# Altium PCB HeadTiltController_V1.PcbDoc
Units mil, origin at the board's own origin, x right, y up, seen from the top; angles counter-clockwise.
Board outline 741.62 x 2350 mil, 2 copper layers (Top Layer, Bottom Layer); 13 components, 34 nets, 76 pads, 9 vias.
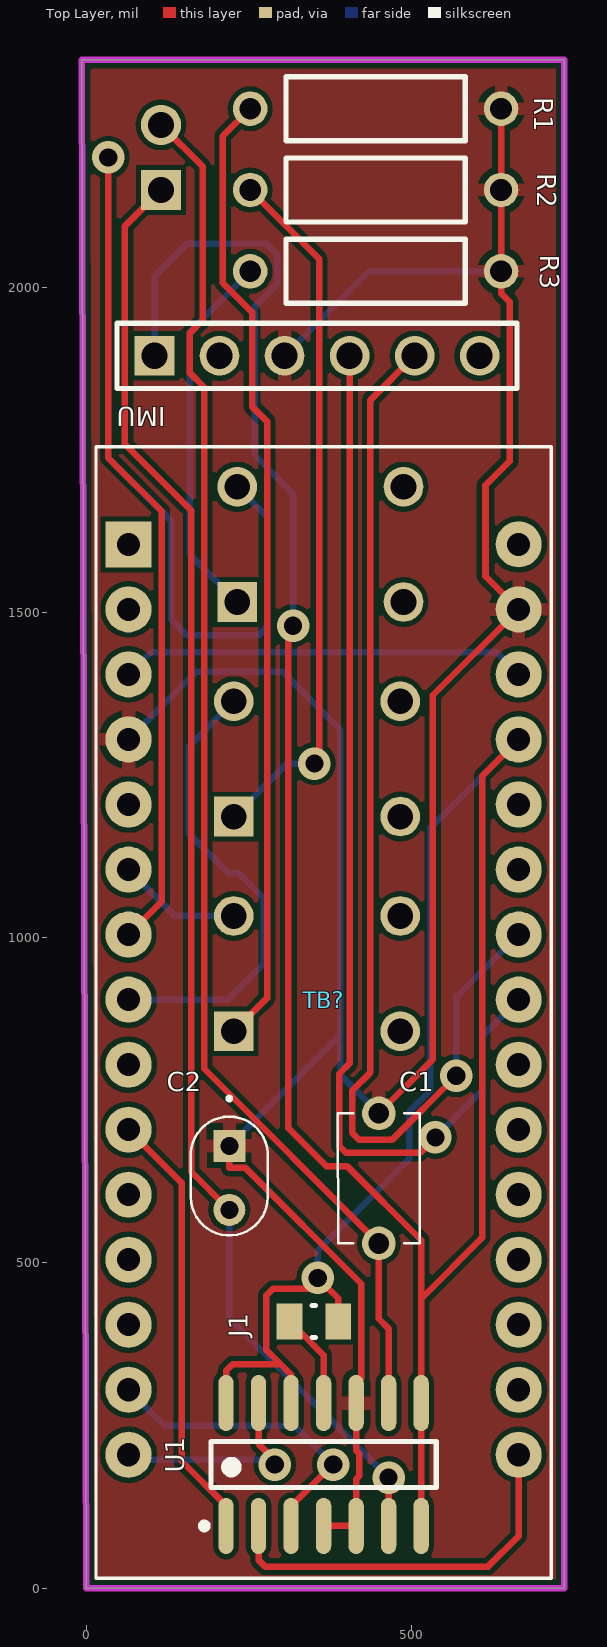
[diagram p0: Top Layer view]
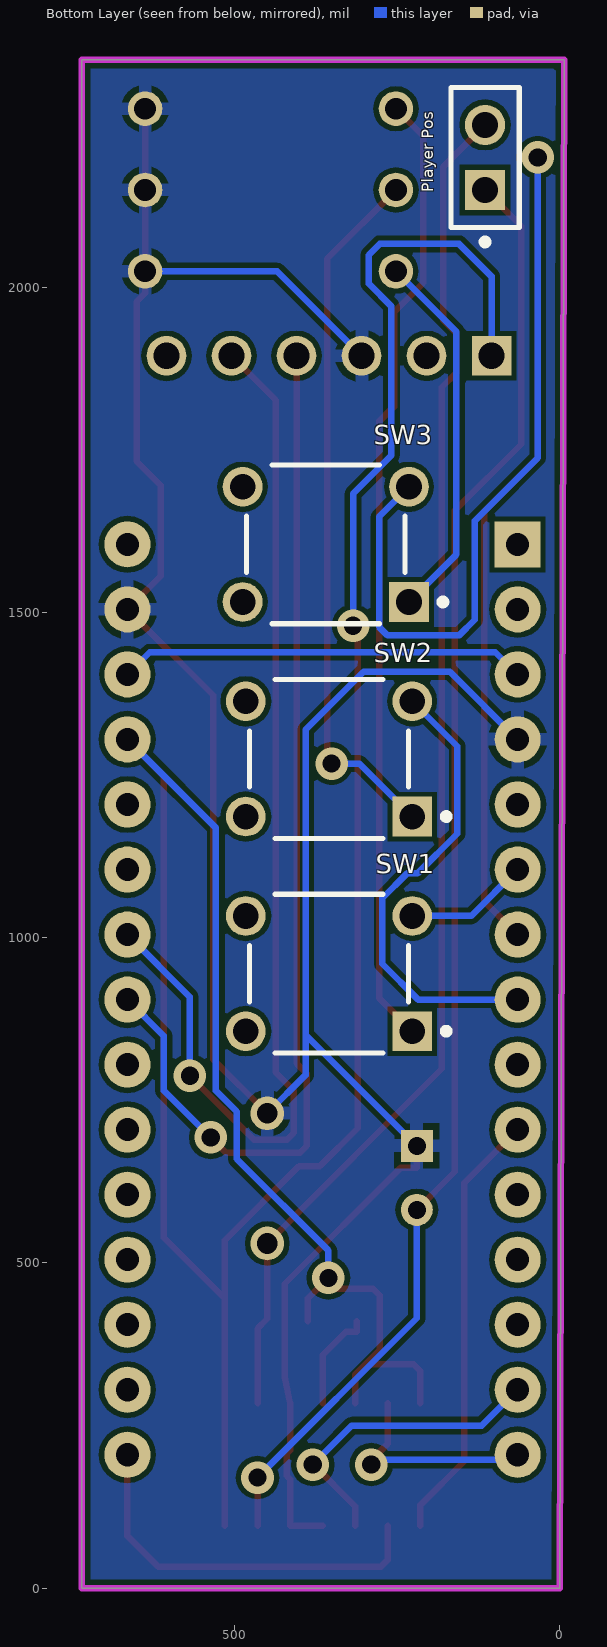
[diagram p1: Bottom Layer view, seen from below]
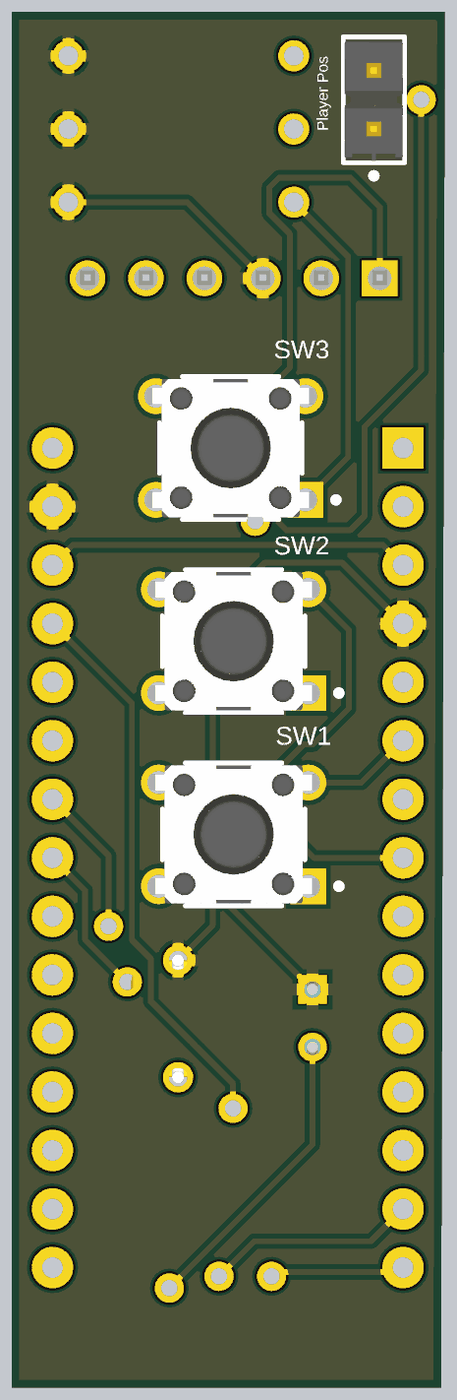
[diagram p2: 3D render of the assembled board from below, using the file's embedded part models]

## Layer stack, top to bottom
Top Solder: solder mask 0.4, Solder Resist, Dk 3.5
Top Layer: signal copper 1.4
Dielectric 1: dielectric 12.6, FR-4, Dk 4.8
Bottom Layer: signal copper 1.4
Bottom Solder: solder mask 0.4, Solder Resist, Dk 3.5

## Board outline
-6.62,2350 735,2350 735,0 0,0

## Design rules (kind name [scope] priority, off if disabled: settings)
BoardOutlineClearance [All] p1: gap=7.87 ignorepadtopadclearanceinfootprint=FALSE except(15.75: Arc-SplitBarrior Arc-SplitContinuation Track-SplitBarrior Track-SplitContinuation SMDPad-SplitBarrior SMDPad-SplitContinuation THPad-SplitBarrior THPad-SplitContinuation Via-SplitBarrior Via-SplitContinuation Fill-SplitBarrior Fill-SplitContinuation Poly-SplitBarrior Poly-SplitContinuation Region-SplitBarrior Region-SplitContinuation Text-SplitBarrior Text-SplitContinuation)
Clearance "Clearance Bottom Layer" [OnLayer('Bottom Layer')] p1: gap=8 ignorepadtopadclearanceinfootprint=TRUE except(10: Arc-Text Track-Text SMDPad-Text THPad-Text Via-Text Fill-Text Poly-Text Region-Text Text-Text)
Clearance "Clearance Top Layer" [OnLayer('Top Layer')] p2: gap=8 ignorepadtopadclearanceinfootprint=TRUE except(10: Arc-Text Track-Text SMDPad-Text THPad-Text Via-Text Fill-Text Poly-Text Region-Text Text-Text)
Clearance [All] p3: gap=7.87 ignorepadtopadclearanceinfootprint=FALSE except(3.5: Arc-Arc Arc-Track Arc-SMDPad Track-Track Track-SMDPad SMDPad-SMDPad; 5: Arc-Via Track-Via SMDPad-Via THPad-Via Via-Via; 10: Arc-Text Track-Text SMDPad-Text THPad-Text Via-Text Fill-Text Poly-Text Region-Text Text-Text)
HoleSize [All] p1: absolutevalues=TRUE maxlimit=248.03 minlimit=7.87 maxpercent=80.000 minpercent=20.000
MinimumAnnularRing [All] p1: minimumring=3
MinimumSolderMaskSliver [All] p1: minsoldermaskwidth=3.94
PolygonConnect PolygonConnect_1 [All] p1: thpad.connectstyle=Relief thpad.reliefconductorwidth=20 thpad.reliefentries=4 thpad.polygonreliefangle="90 Angle" thpad.airgapwidth=10 smdpad.connectstyle=Relief smdpad.reliefconductorwidth=20 smdpad.reliefentries=4 smdpad.polygonreliefangle="90 Angle" smdpad.airgapwidth=10 via.connectstyle=Direct via.reliefconductorwidth=20 via.reliefentries=4 via.polygonreliefangle="90 Angle" via.airgapwidth=10
RoutingCorners [All] p1: cornerstyle=Round minsetback=100 maxsetback=100
RoutingVias [All] p1: holewidth=19.68 width=39.37 viastyle="Through Hole" minholewidth=7.87 minwidth=17.72 maxholewidth=39.37 maxwidth=78.74
SilkToSilkClearance [All] p1: silktosilkclearance=3.94
SilkToSolderMaskClearance [IsPad] p1: minsilkscreentomaskgap=3.94 clearancetoexposedcopper=TRUE
SolderMaskExpansion [All] p1: expansion=4 istentingtop=FALSE
Width [All] p1: maxlimit=100 minlimit=3.5 preferedwidth=15
25 further rules are at their usual default settings.

## Classes and differential pairs
component class HeadTiltController_V1: C1 C2 IMU J1 "Player Pos" R1 R2 SW1 SW2 SW3 U1

## Components (designator, comment, footprint, x,y, rotation, side; value= is the part's Value field where it differs from the comment)
C1 "4.7uF" C322C475K5R5TA 450,730 r270 top
C2 "10uF" FG14 220,680 r270 top
IMU "TSW-106-07-G-S" SMTC-TSW-106-07-X-S 105,1895 r0 top
J1 "" FP-CRCW0805-e3-IPC_B 350,410 r180 top
"Player Pos" "TSW-102-07-G-S" FP-TSW-102-07-G-S-MFG 115,2200 r90 bottom
R1 "10k" OMTE-RES7X2.5-2 445,2275 r0 top
R2 "10k" OMTE-RES7X2.5-2 445,2150 r0 top
R3 "10k" OMTE-RES7X2.5-2 445,2025 r0 top
SW1 "B3F-1070" FP-B3F-1070-MFG#1 355,945 r180 bottom
SW2 "B3F-1070" FP-B3F-1070-MFG#2 355,1275 r180 bottom
SW3 "B3F-1070" FP-B3F-1070-MFG#1 360,1605 r180 bottom
TB? "ARDUINO_NANO" SHIELD_ARDUINO_NANO 365,905 r0 top
U1 "MCP4251-103E/SL" SOIC-SL14_N 365,190 r90 top

## Footprints (in the part's own frame and the unit in brackets; to place one, negate y for a bottom-side part, rotate by r counter-clockwise, add the part's x,y. Pads: shape width x height; smd on the part's side, far side on the other; paste and mask are expansions set on the pad)
C322C475K5R5TA [mm]
  round 1.316 hole 0.81: 1(0,0) 2(5.08,0)
  silkscreen extent 0,-1.6 5.08,1.6, body extent -0.25,-2.03 5.33,2.04, height 6.51
FG14 [mm]
  rect 1.25x1.25 hole 0.7 mask+0.051: 1(0,0)
  round 1.25 hole 0.7: 2(2.5,0)
  silkscreen extent -1.9,-1.5 3.5,1.5, body extent -1.61,-1.5 4.11,1.5, height 5.89
FP-B3F-1070-MFG#1 [mm]
  rect 1.55x1.55 hole 1 paste-1000 mask+0: 1(3.25,-2.25)
  round 1.55 hole 1 paste-1000 mask+0: 2(-3.25,-2.25) 3(3.25,2.25) 4(-3.25,2.25)
  silkscreen extent -3.1,-3.1 4.7,3.1, body extent -3.85,-3 3.85,3, height 9.9
FP-B3F-1070-MFG#2 [mm]
  round 1.55 hole 1 paste-1000 mask+0: 2(-3.25,-2.25) 3(3.25,2.25) 4(-3.25,2.25)
  rect 1.55x1.55 hole 1 paste-1000 mask+0: 2(3.25,-2.25)
  silkscreen extent -3.1,-3.1 4.7,3.1, body extent -3.85,-3 3.85,3, height 9.9
FP-CRCW0805-e3-IPC_B [mil]
  rect 39.63x55.44 smd paste+0 mask+0: 1(-37.44,0) 2(37.44,0)
  silkscreen extent -3,-25 3,25, body extent -67,-38 67,38, height 10
FP-TSW-102-07-G-S-MFG [mm]
  rect 1.57x1.57 hole 1.02 paste-1000 mask+0: 1(-1.27,0)
  round 1.57 hole 1.02 paste-1000 mask+0: 2(1.27,0)
  silkscreen extent -3.42,-1.34 2.73,1.33, body extent -2.67,-1.27 2.54,1.27, height 8.71
OMTE-RES7X2.5-2 [mm] "Resistor, Axial; Body 7x2.5mm, Lead Dia. 0.6mm"
  round 1.35 hole 0.85: 1(-4.9,0) 2(4.9,0)
  silkscreen extent -3.5,-1.25 3.5,1.25, body extent -3.5,-1.25 3.5,1.25, height 2.5
SHIELD_ARDUINO_NANO [mm]
  rect 1.8x1.8 / inner round 1.8 / far side rect 1.8x1.8 hole 0.9: 1(-7.62,17.78)
  round 1.8 hole 0.9: 2(-7.62,15.24) 3(-7.62,12.7) 4(-7.62,10.16) 5(-7.62,7.62) 6(-7.62,5.08) 7(-7.62,2.54) 8(-7.62,0) 9(-7.62,-2.54) 10(-7.62,-5.08) 11(-7.62,-7.62) 12(-7.62,-10.16) 13(-7.62,-12.7) 14(-7.62,-15.24) 15(-7.62,-17.78) 16(7.62,-17.78) 17(7.62,-15.24) 18(7.62,-12.7) 19(7.62,-10.16) 20(7.62,-7.62) 21(7.62,-5.08) 22(7.62,-2.54) 23(7.62,0) 24(7.62,2.54) 25(7.62,5.08) 26(7.62,7.62) 27(7.62,10.16) 28(7.62,12.7) 29(7.62,15.24) 30(7.62,17.78)
  silkscreen extent -8.89,-22.61 8.89,21.59
SMTC-TSW-106-07-X-S [mm] ".025 SQ Post Terminal Strip Assembly, 1x6 Pins, Vertical, 2.54mm Pitch, Male"
  rect 1.55x1.55 hole 1.02: 1(0,0)
  round 1.55 hole 1.02: 2(2.54,0) 3(5.08,0) 4(7.62,0) 5(10.16,0) 6(12.7,0)
  silkscreen extent -1.46,-1.27 14.16,1.27, body extent -1.27,-1.24 13.97,1.3, height 8.38
SOIC-SL14_N [mm] "SOIC, 14-Leads, Body 8.7x3.9mm, Pitch 1.27mm, IPC Medium Density"
  oval 2.2x0.6 smd: 1(-2.4,3.81) 2(-2.4,2.54) 3(-2.4,1.27) 4(-2.4,0) 5(-2.4,-1.27) 6(-2.4,-2.54) 7(-2.4,-3.81) 8(2.4,-3.81) 9(2.4,-2.54) 10(2.4,-1.27) 11(2.4,0) 12(2.4,1.27) 13(2.4,2.54) 14(2.4,3.81)
  silkscreen extent -2.52,-4.4 0.9,4.78, body extent -2,-4.38 2,4.38, height 1.75

## Part data
C1: library part C322C475K5R5TA, "Capacitor", Manufacturer_Name=KEMET, Mouser Part Number=80-C322C475K5R, Arrow Part Number=C322C475K5R5TA, Arrow Price/Stock=https://www.arrow.com/en/products/c322c475k5r5ta/kemet-corporation, Datasheet Link=https://content.kemet.com/datasheets/KEM_C1050_GOLDMAX_X7R.pdf, Height=6.6mm, Manufacturer_Part_Number=C322C475K5R5TA, Mouser Price/Stock=https://www.mouser.co.uk/ProductDetail/KEMET/C322C475K5R5TA?qs=Tap6ps20mlO6CIfw6QCGhw%3D%3D
C2: library part FG14X7R1A106KRT00, "Capacitor", Manufacturer_Name=TDK, Mouser Part Number=810-FG14X7R1A106KRT0, Datasheet Link=https://product.tdk.com/system/files/dam/doc/product/capacitor/ceramic/lead-mlcc/catalog/leadmlcc_halogenfree_fg_en.pdf, Height=5.5mm, Manufacturer_Part_Number=FG14X7R1A106KRT00, Mouser Price/Stock=https://www.mouser.co.uk/ProductDetail/TDK/FG14X7R1A106KRT00?qs=vNwBHymccZ%2FEb8yxejO5lg%3D%3D
IMU: library part CMP-1024-00383-1, "0.025\" SQ Post Header, Through-hole, Vertical, -55 to 125 degC, 2.54 mm Pitch, 6-Pin, Male, RoHS", Manufacturer=Samtec, Temperature Range="-55 to 125 degC", ComponentLink1Description="Manufacturer URL", ComponentLink1URL=http://www.samtec.com, ComponentLink2Description=Datasheet, ComponentLink2URL=http://www.samtec.com/documents/webfiles/pdf/TSW_TH.PDF, ComponentLink3Description="Package Specification", ComponentLink3URL=http://www.samtec.com/documents/webfiles/cpdf/TSW-XXX-XX-XXX-X-XX-XXX-MKT.pdf, DatasheetVersion=F-214, Mounting Technology=Through-hole, Orientation=Vertical, PackageDescription=".025[0.64] SQ. Post Terminal Strip Assembly", PackageReference=TSW-106-07-X-S, PackageVersion="DM, 8/1988", PartNumber=TSW-106-07-G-S, Pitch="2.54 mm", RoHS=True
J1: library part CMP-2001-04897-2, "RES Thick Film, 0Ω, 0.125W, 0805", Case Code (Imperial)=0805, Case Code (Metric)=2012, Max Operating Temperature=155°C, Max Power Dissipation=125mW, Min Operating Temperature=-55°C, Package Quantity=10000, Resistance=0mR, Voltage Rating=150V, Case/Package=0805, Composition="Thick Film", Contact Plating=Tin, Depth=1.25mm, Features="Automotive AEC-Q200", Height=0.02inch, Lead Free="Lead Free", Length=2mm, Military Standard=Not, Number of Terminations=2, Packaging="Tape and Reel", Power Rating=125mW, Radiation Hardening=No, Termination=SMD/SMT, Voltage Rating (DC)=150V, Weight=0.000194oz, Width=0.049inch
"Player Pos": library part CMP-02766-000084-1, "CONN HEADER VERT 2POS 2.54MM", Current Rating=6.3A, Manufacturer=Samtec, Temperature="-55°C to +125°C", Temperature Range High=+125°C, Temperature Range Low=-55°C, Voltage Rating=550V, Automotive=No, Category=Conn, ComponentLink2Description=Datasheet, ComponentLink2URL=http://suddendocs.samtec.com/catalog_english/tsw_th.pdf, Conn Gender=Male, Conn Orientation=Straight, Contact Material=Gold,Nickel, Device Class L1=Connectors, Device Class L2="Headers and Wire Housings", Device Class L3=unset, Digikey Description="CONN HEADER VERT 2POS 2.54MM", Footprint Url=http://suddendocs.samtec.com/prints/tsw-xxx-xx-x-x-xx-xxx-footprint.pdf, Height=8.71mm, Lead Free=Yes, Manufacturer Part Number=TSW-102-07-G-S, Mouser Description="Conn Unshrouded Header HDR 2 POS 2.54mm Solder ST Thru-Hole Automotive Bulk", Number Of Contacts=2, Number Of Rows=1, Octopart=https://octopart.com/tsw-102-07-g-s-samtec-272197, Package=TSW-102-07-G-S, Pitch=2.54mm, RoHS=TRUE
R1 R2 R3: library part CMP-2000-06865-1, "Little Demon(R) Carbon Composition Molded OD Series, 250 V, 10 KOhm, +/-5%, -70 to 130 degC, 2-Pin THD, RoHS, Bulk", Manufacturer=Ohmite, Operating Temperature=-, Package / Case=Axial, Package Description="2-Pin THD Resistor, Body 7 x 2.5 mm, Lead Dia. 0.6 mm", Package Reference=RES7X2.5, PartNumber=OD103JE, Power (Watts)=0.25W,1/4W, Power Rating=0.25W, Standard Package=100, Tolerance=±5%, Catalog Drawings=OD,OF,OASeries, Category=Resistors, Composition=CarbonComposition, Datasheet URL=http://www.ohmite.com/cat/res_od_of_oa.pdf, Datasheet Version=06/2016, EDA / CAD Models=DownloadfromAcceleratedDesigns, Family=ThroughHoleResistors, Features=PulseWithstanding, Height=-, Manufacturer URL=http://www.ohmite.com/, Mounting Technology=ThroughHole, Number of Terminations=2, Online Catalog=OD,OF,OASeries,LittleDemon®, Packaging=Bulk, Resistance (Ohms)=10k, RoHS Information="LittleDemon\"E\"SeriesMaterialDeclaration", Series=LittleDemon®OD, Size / Dimension="0.098\"Diax0.276\"L(2.50mmx7.00mm)", Supplier Device Package=Axial, Temperature Coefficient=-
SW1 SW2 SW3: library part CMP-08834-000056-1, "SWITCH TACTILE SPST-NO 0.05A 24V", Actuator Color=Black, Contact Current Rating=50mA, Contact Resistance=100mR, Insulation Resistance=100MR, Max Operating Temperature=70°C, Max Voltage Rating (DC)=24V, Min Operating Temperature=-25°C, Operating Force=0.98N, Package Quantity=1000, Actuator Length=6.1mm, Actuator Type=Standard, Contact Material=Gold, Contact Plating=Silver, Current Rating=50mA, Depth=7.7mm, Electrical Life=1000000Cycles, Illumination Type=Non-Illuminated, Lead Free="Lead Free", Length=6mm, Max Current Rating=50mA, Mechanical Life=500000Cycles, Mount="Through Hole", Number of Poles=1, Orientation=Straight, Packaging=Bulk, RoHS Compliant=Yes, Series=B3F, Switch Function=Off-Mom, Switch Travel=0.25mm, Termination="PC Pins", Throw Configuration=SPST, Voltage Rating (DC)=24V, Weight=0.25g
TB?: "Small, complete, and breadboard-friendly board based on the ATmega328 (Arduino Nano 3.x)", Package="Non-Standard Arduino", Availability="Not in stock", Check_prices=https://www.snapeda.com/parts/Arduino%20Nano/Arduino/view-part/?ref=eda, MF=Arduino, MP="Arduino Nano", Price=None, SnapEDA_Link=https://www.snapeda.com/parts/Arduino%20Nano/Arduino/view-part/?ref=snap
U1: library part CMP-0188-00503-2, "7/8-Bit Single/Dual SPI Digital POT with Volatile Memory, 14-Pin SOIC 150mil, Extended Temperature", Code_IPC=SOIC127P600-14, Code_JEDEC=MS-012-AB, ComponentLink1Description="Manufacturer URL", ComponentLink1URL=http://www.microchip.com/, ComponentLink2Description=Datasheet, ComponentLink2URL=http://ww1.microchip.com/downloads/en/DeviceDoc/22060b.pdf, ComponentLink3Description="Package Specification", ComponentLink3URL=http://www.microchip.com/stellent/groups/techpub_sg/documents/packagingspec/en012702.pdf, DatasheetVersion="revB, Dec-2008", PackageDescription="14-Lead Plastic Small Outline (SL) - Narrow, 3.90mm Body [SOIC]", PackageReference=SOIC-SL14, PackageVersion="revBB, Aug-2009", RevisionNote="URLs added."

## Via types
v1: diameter 50, hole 28, Top Layer to Bottom Layer, 9 vias

## Nets (pads, with @x,y where several pads share a name; then routed paths per layer and width w, separated by ;. In a path a pad name is that pad's centre, name@x,y a point inside that pad or via, vN(x,y) a via of type N, cw(c..) or ccw(c..) an arc to the next point about the centre after c; other vN are vias at no path point)
3v3: TB?.17
+5: IMU.1 J1.1 TB?.27 U1.7 U1.8 U1.12 U1.14 | length 4815.5
  Top Layer w10: U1.14 215,334.02 225,344.02 298.98,344.02 ; U1.12 315,328 298.98,344.02 ; v1(318,1480) 311,1473 311,707 369,649 401,649 515,535 515,445 ; v1(356,477) v1@373,460 ; J1.1 387.44,445.56 v1@373,460 ; U1.7 U1.8 515,445 ; TB?.27 609,1249 609,539 515,445 ; 298.98,344.02 277,366 277,450 287,460 v1@373,460
  Bottom Layer w10: IMU.1 105,2017 155,2067 277,2067 294,2050 294,2006 259,1971 259,1742 318,1683 v1(318,1480) ; v1(356,477) 356,519 496.86,659.86 496.86,732.75 529,764.89 529,1169 TB?.27
A0: TB?.19
A1: TB?.20
A2: TB?.21
A3: TB?.22
A6: TB?.25
A7: TB?.26
AREF: TB?.18
D0: TB?.2
D1: TB?.1
D2: TB?.5
D3: SW1.3 TB?.6 | length 191.6
  Bottom Layer w10: TB?.6 136.42,1033.58 SW1.3
D4: SW3.3 TB?.7 | length 2398.2
  Top Layer w10: v1(34,2200) 34,1738 116,1656 116,1056 TB?.7
  Bottom Layer w10: v1(34,2200) 34,1738 131,1641 131,1489 155,1465 265,1465 278,1478 278,1647.63 SW3.3
D5: SW2.3 TB?.8 | length 720
  Bottom Layer w10: TB?.8 218,905 273,960 273,1061 235,1099 219,1099 158,1160 158,1294.53 SW2.3
D6: TB?.9
D7: TB?.10 U1.1 | length 671.6
  Top Layer w10: TB?.10 147,623 147,195 215,127 U1.1
D8: TB?.11
D9: TB?.12
D10: TB?.13
GND: C1.1 C2.1 IMU.3 R1.2 R2.2 R3.2 TB?.4 TB?.29 U1.4 U1.5 U1.10 | length 4063.1
  Top Layer w10: C2.1 220,646 245,646 423,468 423,324 U1.10 415,212.07 420,207.07 420,172.43 415,167.43 U1.5 U1.4 ; C1.1 533,813 533,1373 TB?.29 614,1556 614,1696 651,1733 651,1978 637.91,1991.09 R3.2 R2.2 R1.2
  Bottom Layer w10: TB?.4 169.09,1409.09 301.91,1409.09 391,1320 391,851 ; C2.1 391,851 ; IMU.3 435,2025 R3.2 ; C1.1 391,789 391,851
MISO: TB?.15 U1.13 | length 336.1
  Top Layer w10: U1.13 265,221.57 290,196.57 v1(290,190)
  Bottom Layer w10: TB?.15 72.5,197.5 282.5,197.5 v1(290,190)
MOSI: TB?.14 U1.3 | length 484.6
  Top Layer w10: U1.3 315,126 379,190 v1(380,190)
  Bottom Layer w10: TB?.14 120,250 320,250 v1(380,190)
NetJ1_2: J1.2 U1.11 | length 156.9
  Top Layer w10: J1.2 312.56,394 329,394 365,358 U1.11
NetR1_1: R1.1 SW1.1 | length 1485.3
  Top Layer w10: SW1.1 278,907.37 278,1794 255,1817 255,1962 210,2007 210,2232.91 R1.1
NetR2_1: R2.1 SW2.2@227.05,1186.42 | length 1086.5
  Top Layer w10: R2.1 358,2044.09 358,1275 v1(351,1268)
  Bottom Layer w10: SW2.2@227.05,1186.42 308.63,1268 v1(351,1268)
NetR3_1: R3.1 SW3.1 | length 577.4
  Bottom Layer w10: SW3.1 159,1589.47 159,1931.91 R3.1
P_X: "Player Pos.2" C1.2 U1.9 | length 2126.7
  Top Layer w10: 115,2250 179,2186 179,1949.51 159.49,1930 159.49,1868.51 181.54,1846.46 181.54,798.46 C1.2 450,414 465,399 U1.9
P_Y: "Player Pos.1" C2.2 U1.6 | length 2245.5
  Top Layer w10: 115,2150 59.49,2094.49 59.49,1759.09 161.54,1657.05 161.54,640.04 C2.2 ; U1.6 v1(465,170)
  Bottom Layer w10: C2.2 220,415 v1(465,170)
RESET: TB?.3 TB?.28 | length 628.3
  Bottom Layer w10: TB?.3 99.21,1439.21 630.79,1439.21 TB?.28
SCK: TB?.16 U1.2 | length 601.1
  Top Layer w10: U1.2 265,43 275,33 618,33 665,80 TB?.16
SCL: IMU.5 TB?.24 | length 1696.9
  Top Layer w10: IMU.5 437,1827 437,793 409.09,765.09 409.09,700 420,689.09 470.09,689.09 v1(569,788)
  Bottom Layer w10: v1(569,788) 569,909 TB?.24
SDA: IMU.4 TB?.23 | length 1648.9
  Top Layer w10: IMU.4 405,806.81 389.09,790.91 389.09,680 400,669.09 513.09,669.09 v1(537,693)
  Bottom Layer w10: v1(537,693) 609,765 609,849 TB?.23
VIN: TB?.30
pads on no net: IMU.2 IMU.6 SW1.2 SW1.4 SW2.2@482.95,1186.42 SW2.4 SW3.2 SW3.4

## Polygon pours and split planes (outlines as drawn)
GND on Bottom Layer "GND_L02_P001" (solid, pour order 1): -6.62,2350 735,2350 735,0 0,0
GND on Top Layer "GND_L01_P000" (solid, pour order 0): -6.62,2350 735,2350 735,0 0,0

## Keep-outs
Keep-Out Layer:
  the board outline again, w10